# EAGLE board Status Board 0.3 (EAGLE 8.5.2)
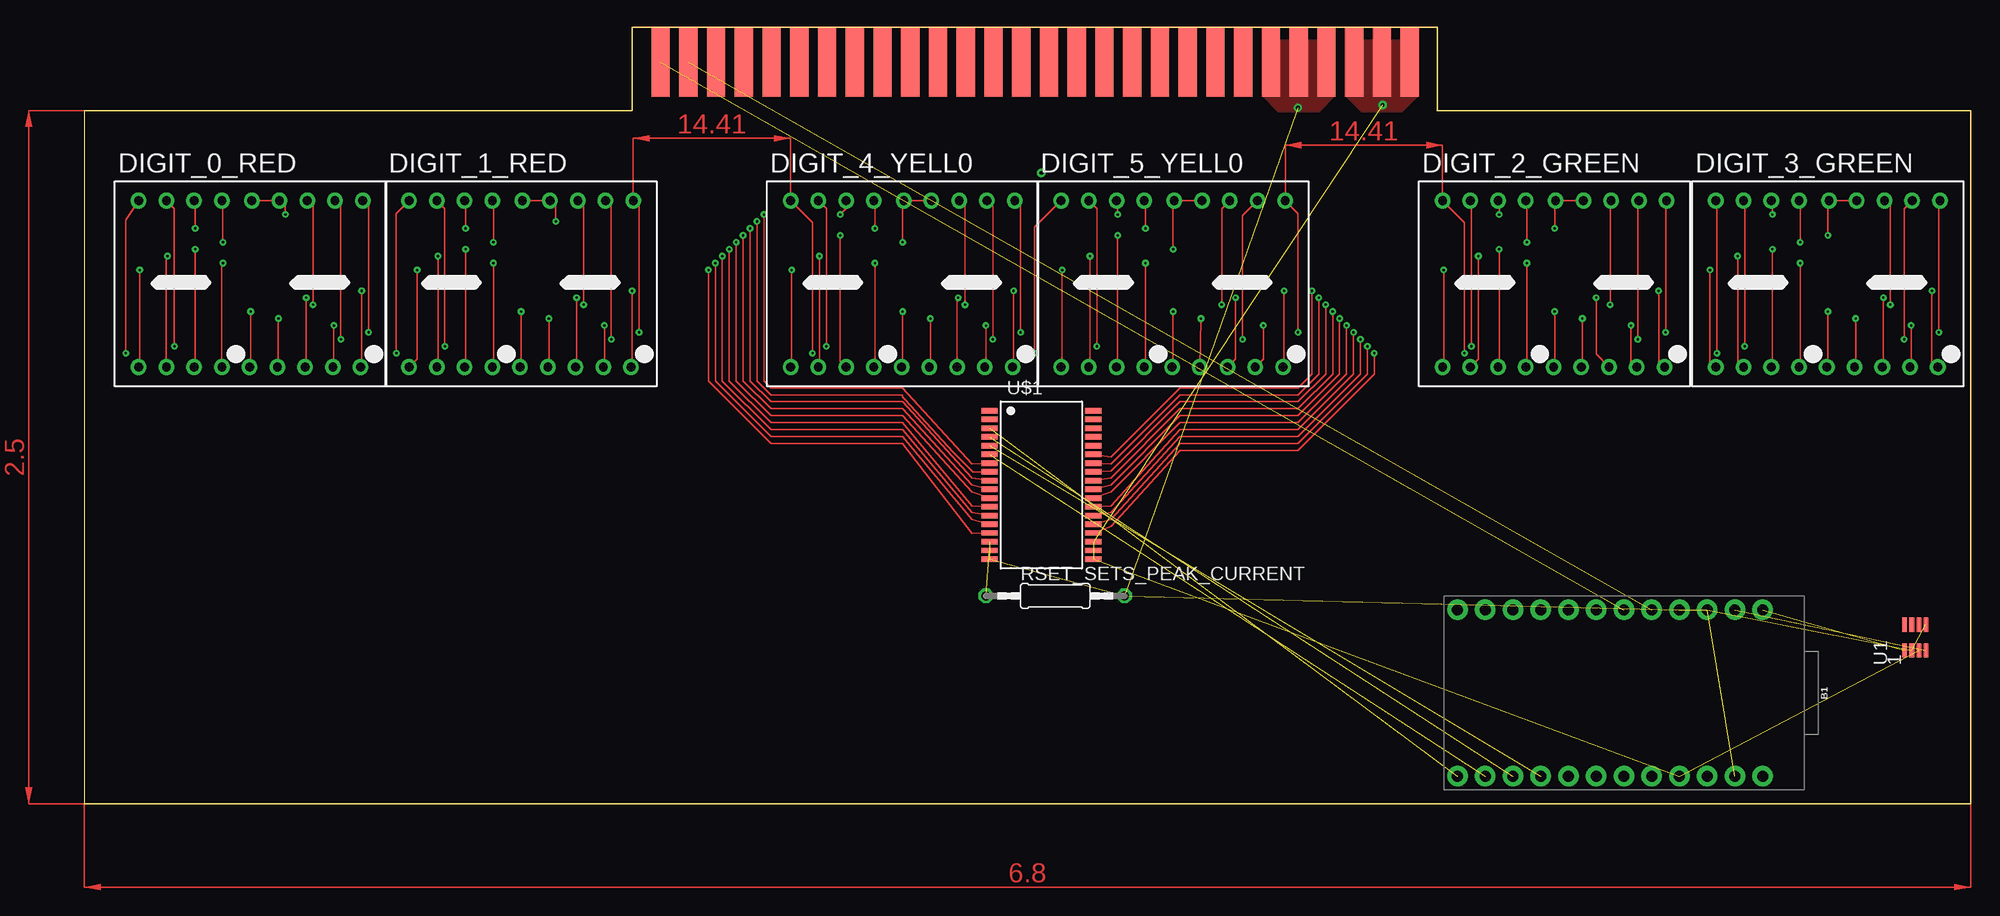
[diagram p0: board, top side]
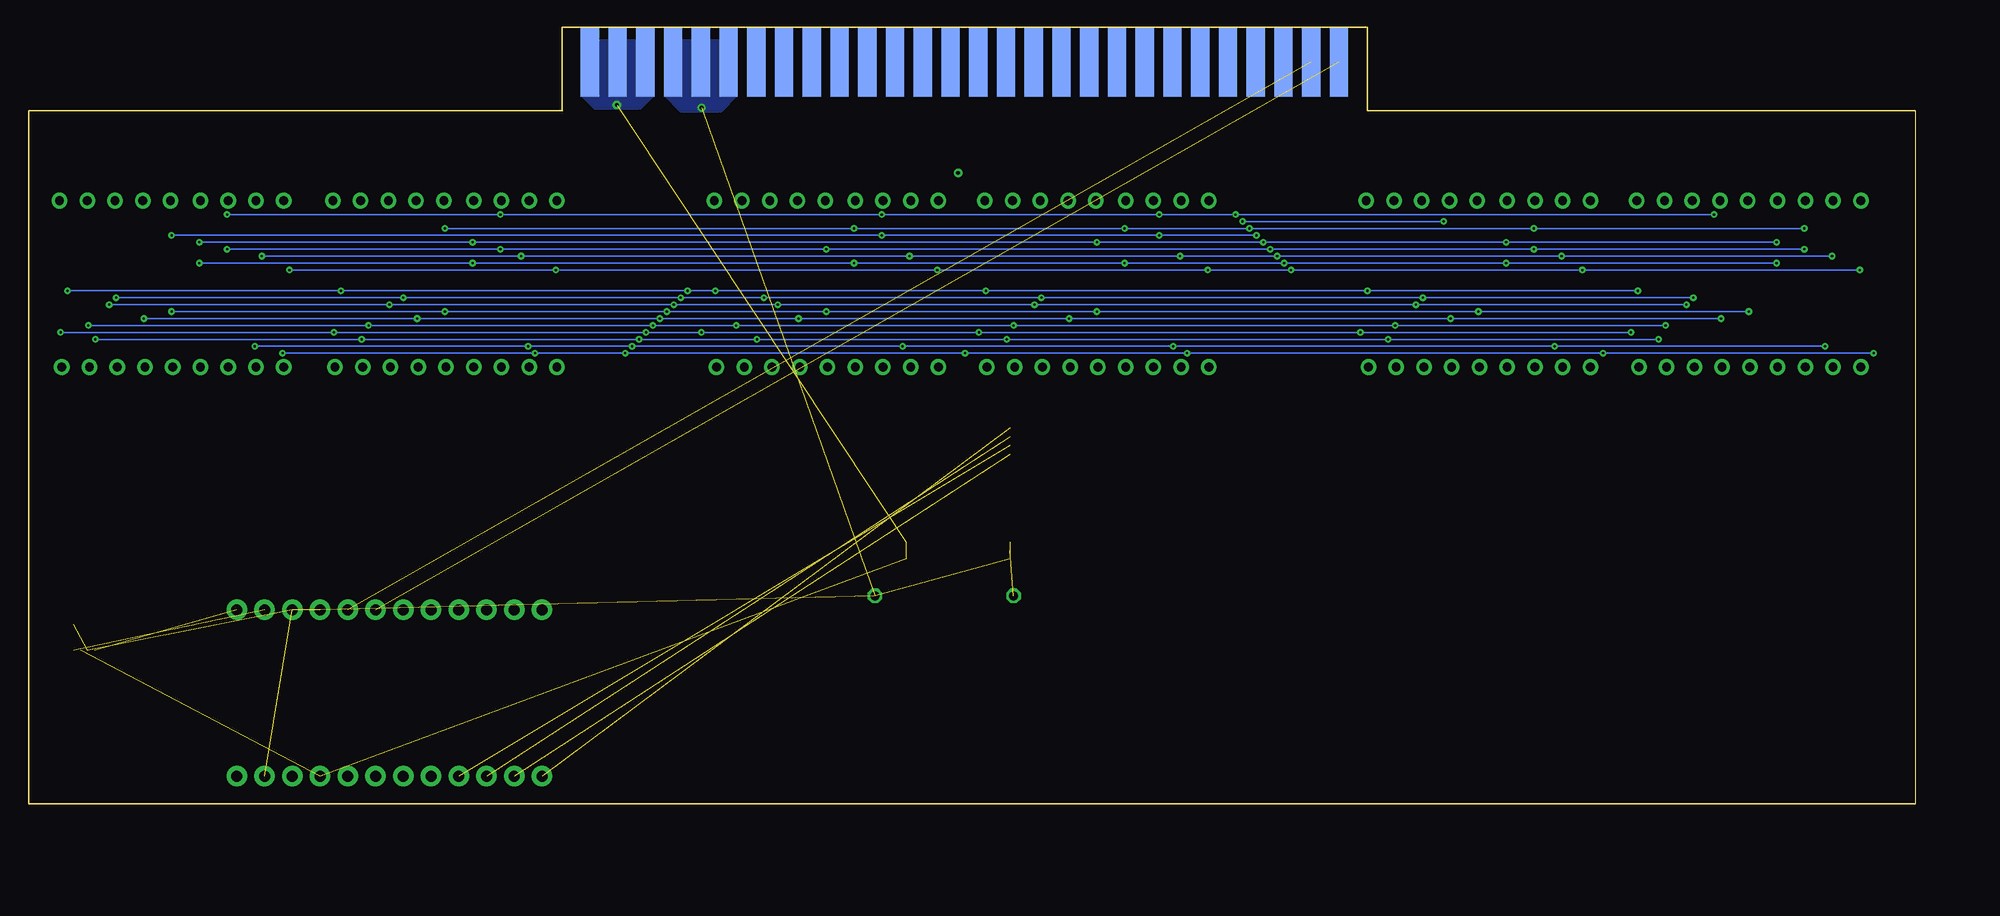
[diagram p1: board, bottom side, seen from below]

Size 172.72 x 71.12 mm. Coordinates in mm from the lower left corner, seen from the top.
Outline: 50.16,63.5 0,63.5 0,0 172.72,0 172.72,63.5 123.83,63.5
Copper layers (1*16): Top 0.035mm / dielectric 1.5mm / Bottom 0.035mm
Design rules "default": minimum track width 6mil, minimum drill 0.35mm, track to track 6mil, track to pad 6mil, pad to pad 6mil, via to via 6mil, smd to smd 6mil, copper to edge 40mil, drill to drill 6mil, minimum pad ring 10mil, minimum via ring 8mil, stop-mask expansion 4mil, vias tented up to drill 0mil, thermal gap 10mil

## Footprints (pad centres in the part's own frame; a part is rotated, then mirrored left to right if it is on the bottom)
SPARKFUN_PRO_MICRO = drill 1.016 pad 1.88: 1 -7.62,12.7; 2 -7.62,10.16; 3 -7.62,7.62; 4 -7.62,5.08; 5 -7.62,2.54; 6 -7.62,0; 7 -7.62,-2.54; 8 -7.62,-5.08; 9 -7.62,-7.62; 10 -7.62,-10.16; 11 -7.62,-12.7; 12 -7.62,-15.24; 13 7.62,-15.24; 14 7.62,-12.7; 15 7.62,-10.16; 16 7.62,-7.62; 17 7.62,-5.08; 18 7.62,-2.54; 19 7.62,0; 20 7.62,2.54; 21 7.62,5.08; 22 7.62,7.62; 23 7.62,10.16; 24 7.62,12.7
DA56 = drill 0.8 pad 1.422: 1 -10.26,-7.62; 2 -7.72,-7.62; 3 -5.18,-7.62; 4 -2.64,-7.62; 5 -0.1,-7.62; 6 2.44,-7.62; 7 4.98,-7.62; 8 7.52,-7.62; 9 10.06,-7.62; 10 10.26,7.62; 11 7.72,7.62; 12 5.18,7.62; 13 2.64,7.62; 14 0.1,7.62; 15 -2.64,7.62; 16 -5.18,7.62; 17 -7.72,7.62; 18 -10.26,7.62
1X02 = drill 1.016 pad 1.88: 1 0,0; 2 2.54,0
LED3MM = drill 0.813 octagon: A -1.27,0; K 1.27,0
0207/12 = drill 0.813 octagon: 1 -6.35,0; 2 6.35,0
8-SOICN = smd 1.3 x 0.42: 1 -1.175,0.975; 2 -1.175,0.325; 3 -1.174,-0.325; 4 -1.175,-0.975; 5 1.175,0.975; 6 1.175,0.325; 7 1.174,-0.325; 8 1.175,-0.975
SSOP36 = smd 0.5 x 1.5: 1 -6.8,-4.75; 2 -6,-4.75; 3 -5.2,-4.75; 4 -4.4,-4.75; 5 -3.6,-4.75; 6 -2.8,-4.75; 7 -2,-4.75; 8 -1.2,-4.75; 9 -0.4,-4.75; 10 0.4,-4.75; 11 1.2,-4.75; 12 2,-4.75; 13 2.8,-4.75; 14 3.6,-4.75; 15 4.4,-4.75; 16 5.2,-4.75; 17 6,-4.75; 18 6.8,-4.75; 19 6.8,4.75; 20 6,4.75; 21 5.2,4.75; 22 4.4,4.75; 23 3.6,4.75; 24 2.8,4.75; 25 2,4.75; 26 1.2,4.75; 27 0.4,4.75; 28 -0.4,4.75; 29 -1.2,4.75; 30 -2,4.75; 31 -2.8,4.75; 32 -3.6,4.75; 33 -4.4,4.75; 34 -5.2,4.75; 35 -6,4.75; 36 -6.8,4.75
5530843-6-BOARDFINGERS = smd 1.651 x 6.35 bottom: 3.3V_4 0.826,3.175; 3.3V_5 3.365,3.175; 3.3V_6 5.905,3.175; EXTRA1 16.066,3.175; EXTRA2 18.605,3.175; EXTRA3 21.145,3.175; EXTRA4 23.686,3.175; EXTRA5 26.226,3.175; EXTRA6 28.765,3.175; EXTRA7 31.305,3.175; EXTRA8 33.846,3.175; EXTRA9 36.386,3.175; EXTRA10 38.925,3.175; EXTRA11 41.465,3.175; EXTRA12 44.005,3.175; EXTRA13 46.545,3.175; EXTRA14 49.086,3.175; EXTRA15 51.626,3.175; EXTRA16 54.166,3.175; EXTRA17 56.706,3.175; EXTRA18 59.245,3.175; EXTRA19 61.785,3.175; EXTRA20 64.326,3.175; EXTRA21 66.865,3.175; EXTRA22 69.406,3.175; GND_4 8.445,3.175; GND_5 10.986,3.175; GND_6 13.525,3.175 | smd 1.651 x 6.35: 3.3VP1 0.826,3.175; 3.3VP2 3.365,3.175; 3.3VP3 5.905,3.175; CAN_H 51.626,3.175; CAN_L 54.166,3.175; EXTRA23 16.066,3.175; EXTRA24 18.605,3.175; EXTRA25 21.145,3.175; EXTRA26 23.686,3.175; EXTRA27 26.226,3.175; EXTRA28 28.765,3.175; EXTRA29 31.305,3.175; EXTRA30 33.846,3.175; EXTRA31 36.386,3.175; EXTRA32 38.925,3.175; EXTRA33 41.465,3.175; EXTRA34 44.005,3.175; EXTRA35 46.545,3.175; GND1 8.445,3.175; GND2 10.986,3.175; GND3 13.525,3.175; KILL_SWITCH 49.086,3.175; SCL_DEPTH 59.245,3.175; SCL_ESC 69.406,3.175; SCL_SENSOR 64.326,3.175; SDA_DEPTH 56.706,3.175; SDA_ESC 66.865,3.175; SDA_SENSOR 61.785,3.175

## Placement (x,y rotation side)
B1  SPARKFUN_PRO_MICRO  [SPARKFUN_PRO_MICRO]  140.97,10.16 270 top
DIGIT_0_RED  DC56-11SRWA  [DA56]  15.24,47.62 0 top
DIGIT_1_RED  DC56-11SRWA  [DA56]  40.01,47.62 0 top
DIGIT_2_GREEN  DC56-11GWA  [DA56]  134.62,47.62 0 top
DIGIT_3_GREEN  DC56-11GWA  [DA56]  159.64,47.62 0 top
DIGIT_4_YELL0  DC56-11YWA  [DA56]  74.93,47.62 0 top
DIGIT_5_YELL0  DC56-11YWA  [DA56]  99.69,47.62 0 top
J1  [1X02]  -53.34,114.3 0 top  (outside the outline)
LED7  [LED3MM]  -29.21,115.57 0 top  (outside the outline)
LED8  [LED3MM]  -38.1,115.57 0 top  (outside the outline)
LED9  [LED3MM]  -46.99,115.57 0 top  (outside the outline)
LED10  [LED3MM]  -81.28,110.49 0 top  (outside the outline)
LED11  [LED3MM]  -91.44,110.49 0 top  (outside the outline)
LED12  [LED3MM]  -20.32,115.57 0 top  (outside the outline)
RSET_SETS_PEAK_CURRENT  [0207/12]  88.9,19.05 0 top
U1  MAX3051ESA  [8-SOICN]  167.64,15.24 90 top
U$1  MAX6954  [SSOP36]  87.63,29.21 270 top
U$2  5530843  [5530843-6-BOARDFINGERS]  122.17,71.12 180 top

## Library data of the parts
B1 = SparkFun-Boards
DIGIT_0_RED DIGIT_1_RED DIGIT_2_GREEN DIGIT_3_GREEN DIGIT_4_YELL0 DIGIT_5_YELL0 = display-kingbright; OC_FARNELL: unknown; OC_NEWARK: unknown
J1 = SparkFun-Connectors
LED7-LED12 = led
RSET_SETS_PEAK_CURRENT = resistor
U1 = MAX3051ESA; AVAILABILITY: Good; DESCRIPTION: IC TXRX CAN 1MBPS 8-SOIC; MF: Maxim Integrated; MP: MAX3051ESA+; PACKAGE: SOIC-8 Maxim Integrated; PRICE: 2.21 USD
U$1 = MAX6954
U$2 = 5530843-6

## Nets
GND: B1.3 B1.4 B1.23 RSET_SETS_PEAK_CURRENT.2 U1.2 U1.8 U$1.16 U$1.18 U$2.GND1 U$2.GND2 U$2.GND3 U$2.GND_4 U$2.GND_5 U$2.GND_6
N$20: DIGIT_0_RED.13 DIGIT_0_RED.14 DIGIT_2_GREEN.16 DIGIT_3_GREEN.16 DIGIT_4_YELL0.16 DIGIT_5_YELL0.16 U$1.7
N$21: DIGIT_1_RED.13 DIGIT_1_RED.14 U$1.8
N$22: DIGIT_0_RED.16 DIGIT_1_RED.16 DIGIT_2_GREEN.13 DIGIT_2_GREEN.14 DIGIT_4_YELL0.15 DIGIT_5_YELL0.15 U$1.9
N$23: DIGIT_3_GREEN.13 DIGIT_3_GREEN.14 DIGIT_4_YELL0.3 DIGIT_5_YELL0.3 U$1.10
N$24: B1.14 U$1.6
N$25: B1.15 U$1.4
N$26: DIGIT_0_RED.15 DIGIT_1_RED.15 DIGIT_2_GREEN.15 DIGIT_3_GREEN.15 DIGIT_4_YELL0.13 DIGIT_4_YELL0.14 U$1.11
N$27: DIGIT_0_RED.3 DIGIT_1_RED.3 DIGIT_2_GREEN.3 DIGIT_3_GREEN.3 DIGIT_5_YELL0.13 DIGIT_5_YELL0.14 U$1.12
N$28: DIGIT_0_RED.1 DIGIT_1_RED.1 DIGIT_2_GREEN.1 DIGIT_3_GREEN.1 DIGIT_4_YELL0.1 DIGIT_5_YELL0.1 U$1.15
N$29: DIGIT_0_RED.18 DIGIT_1_RED.18 DIGIT_2_GREEN.18 DIGIT_3_GREEN.18 DIGIT_4_YELL0.18 DIGIT_5_YELL0.18 U$1.22
N$30: DIGIT_0_RED.17 DIGIT_1_RED.17 DIGIT_2_GREEN.17 DIGIT_3_GREEN.17 DIGIT_4_YELL0.17 DIGIT_5_YELL0.17 U$1.23
N$31: DIGIT_0_RED.11 DIGIT_1_RED.11 DIGIT_2_GREEN.11 DIGIT_3_GREEN.11 DIGIT_4_YELL0.11 DIGIT_5_YELL0.11 U$1.24
N$32: DIGIT_0_RED.10 DIGIT_1_RED.10 DIGIT_2_GREEN.10 DIGIT_3_GREEN.10 DIGIT_4_YELL0.10 DIGIT_5_YELL0.10 U$1.25
N$33: DIGIT_0_RED.2 DIGIT_1_RED.2 DIGIT_2_GREEN.2 DIGIT_3_GREEN.2 DIGIT_4_YELL0.2 DIGIT_5_YELL0.2 U$1.13
N$34: DIGIT_0_RED.6 DIGIT_1_RED.6 DIGIT_2_GREEN.6 DIGIT_3_GREEN.6 DIGIT_4_YELL0.6 DIGIT_5_YELL0.6 U$1.27
N$35: DIGIT_0_RED.5 DIGIT_1_RED.5 DIGIT_2_GREEN.5 DIGIT_3_GREEN.5 DIGIT_4_YELL0.5 DIGIT_5_YELL0.5 U$1.28
N$36: DIGIT_0_RED.12 DIGIT_1_RED.12 DIGIT_2_GREEN.12 DIGIT_3_GREEN.12 DIGIT_4_YELL0.12 DIGIT_5_YELL0.12 U$1.29
N$37: DIGIT_0_RED.7 DIGIT_1_RED.7 DIGIT_2_GREEN.7 DIGIT_3_GREEN.7 DIGIT_4_YELL0.7 DIGIT_5_YELL0.7 U$1.30
N$38: DIGIT_0_RED.9 DIGIT_1_RED.9 DIGIT_2_GREEN.9 DIGIT_3_GREEN.9 DIGIT_4_YELL0.9 DIGIT_5_YELL0.9 U$1.31
N$39: B1.16 U$1.5
N$40: DIGIT_0_RED.8 DIGIT_1_RED.8 DIGIT_2_GREEN.8 DIGIT_3_GREEN.8 DIGIT_4_YELL0.8 DIGIT_5_YELL0.8 U$1.26
N$41: B1.13 U$1.3
N$42: B1.6 U$2.SCL_ESC
N$43: B1.5 U$2.SDA_ESC
N$44: B1.1 U1.1
N$45: B1.2 U1.4
N$46: RSET_SETS_PEAK_CURRENT.1 U$1.17
N$56: DIGIT_0_RED.4 DIGIT_1_RED.4 DIGIT_2_GREEN.4 DIGIT_3_GREEN.4 DIGIT_4_YELL0.4 DIGIT_5_YELL0.4 U$1.14
RAW: B1.24
VCC: B1.21 U1.3 U$1.19 U$1.21 U$2.3.3V_4 U$2.3.3V_5 U$2.3.3V_6 U$2.3.3VP1 U$2.3.3VP2 U$2.3.3VP3

## Tracks (layer width: path | path; a pad name or v marks a point on that pad's centre or on a via)
GND  (via drill 0.35)  (8 unrouted)
  other vias: 111.12,63.75
  pour Bottom (no thermals): 114.43,70.23 107.95,70.23 107.95,64.9 109.35,63.5 113.03,63.5 114.43,64.9
  pour Top (no thermals): 107.95,64.9 109.35,63.5 113.03,63.5 114.43,64.9 114.43,69.85 107.95,69.85
N$1  (via drill 0.35)
  other vias: 87.63,57.78
N$20  (via drill 0.2)
  Top 0.152: U$1.7 81.28,31.11 74.93,38.1 62.87,38.1 62.23,38.73 v62.23,53.98 | DIGIT_0_RED.14 DIGIT_0_RED.13 18.41,54.71 v18.41,53.98 | v129.54,53.98 129.54,55.15 DIGIT_2_GREEN.16 | v154.56,53.98 154.56,55.15 DIGIT_3_GREEN.16 | v69.22,53.98 69.75,54.51 DIGIT_4_YELL0.16 | DIGIT_5_YELL0.16 94.61,55.15 v94.61,53.98
  Bottom 0.152: v18.41,53.98 v62.23,53.98 v69.22,53.98 v94.61,53.98 v129.54,53.98 v154.56,53.98
N$21  (via drill 0.2)
  Top 0.152: DIGIT_1_RED.14 DIGIT_1_RED.13 43.18,54.71 v43.18,53.34 | U$1.8 81.35,30.41 79.55,32.22 75.16,37.04 74.93,37.27 74.93,37.47 62.87,37.47 61.59,38.73 v61.59,53.34
  Bottom 0.152: v61.59,53.34 v43.18,53.34
N$22  (via drill 0.2)
  Top 0.152: U$1.9 81.28,29.84 74.93,36.83 62.87,36.83 60.96,38.73 v60.96,52.7 | v10.16,52.7 10.16,55.15 DIGIT_0_RED.16 | v34.92,52.7 34.92,55.15 DIGIT_1_RED.16 | v72.39,52.7 72.39,55.15 DIGIT_4_YELL0.15 | DIGIT_5_YELL0.15 97.16,55.15 v97.16,52.7 | v134.62,52.7 134.62,55.15 DIGIT_2_GREEN.14 DIGIT_2_GREEN.13
  Bottom 0.152: v10.16,52.7 v34.92,52.7 v60.96,52.7 v72.39,52.7 v97.16,52.7 v134.62,52.7
N$23  (via drill 0.2)
  Top 0.152: U$1.10 81.28,29.21 74.93,36.2 62.87,36.2 60.33,38.73 v60.33,52.07 | DIGIT_3_GREEN.13 DIGIT_3_GREEN.14 159.64,55.15 v159.64,52.07 | v69.22,52.07 69.22,40.54 DIGIT_4_YELL0.3 | v94.61,52.07 94.61,40.1 DIGIT_5_YELL0.3
  Bottom 0.152: v60.33,52.07 v69.22,52.07 v94.61,52.07 v159.64,52.07
N$24  (1 unrouted)
N$25  (1 unrouted)
N$26  (via drill 0.2)
  Top 0.152: U$1.11 81.28,28.57 74.93,35.56 62.87,35.56 59.69,38.73 v59.69,51.44 | DIGIT_4_YELL0.13 DIGIT_4_YELL0.14 74.93,55.15 v74.93,51.44 | v12.7,51.44 12.7,55.15 DIGIT_0_RED.15 | v37.47,51.44 37.47,55.15 DIGIT_1_RED.15 | v132.08,51.44 132.08,55.15 DIGIT_2_GREEN.15 | v157.1,51.44 157.1,55.15 DIGIT_3_GREEN.15
  Bottom 0.152: v12.7,51.44 v37.47,51.44 v59.69,51.44 v74.93,51.44 v132.08,51.44 v157.1,51.44
N$27  (via drill 0.2)
  Top 0.152: U$1.12 81.28,27.3 74.93,34.92 62.87,34.92 59.05,38.73 v59.05,50.8 | DIGIT_5_YELL0.13 DIGIT_5_YELL0.14 99.69,55.15 v99.69,50.8 | v10.16,50.8 10.16,40.1 DIGIT_0_RED.3 | v34.92,50.8 34.92,40.1 DIGIT_1_RED.3 | v129.54,50.8 129.54,40.1 DIGIT_2_GREEN.3 | v154.56,50.8 154.56,40.1 DIGIT_3_GREEN.3
  Bottom 0.152: v10.16,50.8 v34.92,50.8 v59.05,50.8 v99.69,50.8 v129.54,50.8 v154.56,50.8
N$28  (via drill 0.2)
  Top 0.152: U$1.15 81.28,24.77 74.93,33.02 62.87,33.02 57.15,38.73 v57.15,48.9 | v30.48,48.9 30.48,40.74 DIGIT_1_RED.1 | v5.08,48.9 5.08,40.1 DIGIT_0_RED.1 | v64.77,48.9 64.77,40.1 DIGIT_4_YELL0.1 | v89.53,48.9 89.53,40.1 DIGIT_5_YELL0.1 | v124.46,48.9 124.46,40.1 DIGIT_2_GREEN.1 | v148.84,48.9 148.84,40.54 DIGIT_3_GREEN.1
  Bottom 0.152: v5.08,48.9 v30.48,48.9 v57.15,48.9 v64.77,48.9 v89.53,48.9 v124.46,48.9 v148.84,48.9
N$29  (via drill 0.2)
  Top 0.152: U$1.22 93.98,25.4 100.33,32.38 111.12,32.38 118.11,39.37 v118.11,41.27 | v28.57,41.27 28.57,54.08 DIGIT_1_RED.18 | v3.81,41.27 3.81,53.44 DIGIT_0_RED.18 | v66.67,41.27 66.67,53.24 DIGIT_4_YELL0.18 | v87,41.27 87,52.8 DIGIT_5_YELL0.18 | v126.36,41.27 126.36,53.24 DIGIT_2_GREEN.18 | v149.48,41.27 149.48,55.15 DIGIT_3_GREEN.18
  Bottom 0.152: v3.81,41.27 v28.57,41.27 v66.67,41.27 v87,41.27 v118.11,41.27 v126.36,41.27 v149.48,41.27
N$30  (via drill 0.2)
  Top 0.152: U$1.23 93.98,26.04 100.33,33.02 111.12,33.02 117.47,39.37 v117.47,41.91 | v127,41.91 127,55.15 DIGIT_2_GREEN.17 | DIGIT_5_YELL0.17 92.71,54.51 v92.71,41.91 | v67.94,41.91 67.94,54.51 DIGIT_4_YELL0.17 | DIGIT_1_RED.17 33.02,54.51 v33.02,41.91 | v8.26,41.91 8.26,54.51 DIGIT_0_RED.17 | DIGIT_3_GREEN.17 152.02,55.15 v152.02,41.91
  Bottom 0.152: v8.26,41.91 v33.02,41.91 v67.94,41.91 v92.71,41.91 v117.47,41.91 v127,41.91 v152.02,41.91
N$31  (via drill 0.2)
  Top 0.152: U$1.24 93.98,26.67 100.33,33.66 111.12,33.66 116.84,39.37 v116.84,42.55 | v106.05,42.55 106.05,53.88 DIGIT_5_YELL0.11 | DIGIT_2_GREEN.11 142.24,55.15 v142.24,42.55 | DIGIT_3_GREEN.11 166.62,54.51 v166.62,42.55 | DIGIT_4_YELL0.11 83.19,54.71 v83.19,42.55 | DIGIT_1_RED.11 48.26,54.71 v48.26,42.55 | DIGIT_0_RED.11 23.5,54.71 v23.5,42.55
  Bottom 0.152: v166.62,42.55 v142.24,42.55 v116.84,42.55 v106.05,42.55 v83.19,42.55 v48.26,42.55 v23.5,42.55
N$32  (via drill 0.2)
  Top 0.152: U$1.25 93.98,27.3 100.33,34.29 111.12,34.29 116.2,39.37 v116.2,43.18 | v111.12,43.18 111.12,54.08 DIGIT_5_YELL0.10 | v144.78,43.18 144.78,55.15 DIGIT_2_GREEN.10 | DIGIT_3_GREEN.10 169.8,55.15 v169.8,43.18 | DIGIT_4_YELL0.10 85.72,54.71 v85.72,43.18 | DIGIT_1_RED.10 50.8,54.71 v50.8,43.18 | DIGIT_0_RED.10 26.04,54.71 v26.04,43.18
  Bottom 0.152: v169.8,43.18 v144.78,43.18 v116.2,43.18 v111.12,43.18 v85.72,43.18 v50.8,43.18 v26.04,43.18
N$33  (via drill 0.2)
  Top 0.152: U$1.13 81.28,26.67 74.93,34.29 62.87,34.29 58.42,38.73 v58.42,50.16 | DIGIT_0_RED.2 7.52,50.06 v7.62,50.16 | v32.38,50.16 32.38,40.1 DIGIT_1_RED.2 | v67.31,50.16 67.31,40.1 DIGIT_4_YELL0.2 | v92.08,50.16 92.08,40.1 DIGIT_5_YELL0.2 | DIGIT_2_GREEN.2 127.64,40.74 v127.64,50.16 | DIGIT_3_GREEN.2 151.38,40.54 v151.38,50.16
  Bottom 0.152: v7.62,50.16 v32.38,50.16 v58.42,50.16 v67.31,50.16 v92.08,50.16 v127.64,50.16 v151.38,50.16
N$34  (via drill 0.2)
  Top 0.152: U$1.27 93.98,29.21 100.33,35.56 111.12,35.56 114.94,39.37 v114.94,44.45 | v102.23,44.45 DIGIT_5_YELL0.6 | DIGIT_2_GREEN.6 137.16,40.1 v137.16,44.45 | DIGIT_3_GREEN.6 162.18,40.1 v162.18,44.45 | v77.47,44.45 77.47,40.1 DIGIT_4_YELL0.6 | DIGIT_1_RED.6 42.55,40.1 v42.55,44.45 | v17.78,44.45 17.78,40.1 DIGIT_0_RED.6
  Bottom 0.152: v162.18,44.45 v137.16,44.45 v114.94,44.45 v102.23,44.45 v77.47,44.45 v42.55,44.45 v17.78,44.45
N$35  (via drill 0.2)
  Top 0.152: U$1.28 93.98,29.84 100.33,36.2 111.12,36.2 114.3,39.37 v114.3,45.09 | v15.24,45.09 15.24,40.1 DIGIT_0_RED.5 | v40.01,45.09 40.01,40.1 DIGIT_1_RED.5 | v74.93,45.09 74.93,40.1 DIGIT_4_YELL0.5 | v99.69,45.09 99.69,40.1 DIGIT_5_YELL0.5 | v134.62,45.09 134.62,40.1 DIGIT_2_GREEN.5 | DIGIT_3_GREEN.5 159.64,40.1 v159.64,45.09
  Bottom 0.152: v15.24,45.09 v40.01,45.09 v74.93,45.09 v99.69,45.09 v114.3,45.09 v134.62,45.09 v159.64,45.09
N$36  (via drill 0.2)
  Top 0.152: U$1.29 93.98,30.48 100.33,36.83 111.12,36.83 113.67,39.37 v113.67,45.72 | v104.14,45.72 104.14,54.51 DIGIT_5_YELL0.12 | v139.7,45.72 139.7,55.15 DIGIT_2_GREEN.12 | v165.35,45.72 165.35,54.71 DIGIT_3_GREEN.12 | DIGIT_4_YELL0.12 80.64,54.71 v80.64,45.72 | DIGIT_1_RED.12 45.72,54.71 v45.72,45.72 | DIGIT_0_RED.12 20.95,54.71 v20.95,45.72
  Bottom 0.152: v165.35,45.72 v139.7,45.72 v113.67,45.72 v104.14,45.72 v80.64,45.72 v45.72,45.72 v20.95,45.72
N$37  (via drill 0.2)
  Top 0.152: U$1.30 93.98,31.11 100.33,37.47 111.12,37.47 113.03,39.37 v113.03,46.35 | v80.01,46.35 79.91,46.26 DIGIT_4_YELL0.7 | v138.43,46.35 138.43,41.17 DIGIT_2_GREEN.7 | v45.09,46.35 45.09,40.1 DIGIT_1_RED.7 | v20.32,46.35 20.32,40.1 DIGIT_0_RED.7 | v105.41,46.35 105.41,40.74 DIGIT_5_YELL0.7 | DIGIT_3_GREEN.7 164.72,40.1 v164.72,46.35
  Bottom 0.152: v20.32,46.35 v45.09,46.35 v80.01,46.35 v105.41,46.35 v113.03,46.35 v138.43,46.35 v164.72,46.35
N$38  (via drill 0.2)
  Top 0.152: U$1.31 93.98,31.75 100.33,38.1 111.12,38.1 112.39,39.37 v112.39,46.99 | v109.86,46.99 109.86,40.1 DIGIT_5_YELL0.9 | DIGIT_4_YELL0.9 85.09,40.1 v85.09,46.99 | DIGIT_1_RED.9 50.16,40.1 v50.16,46.99 | DIGIT_0_RED.9 25.4,40.1 v25.4,46.99 | v144.15,46.99 144.15,40.54 DIGIT_2_GREEN.9 | v169.16,46.99 169.16,40.54 DIGIT_3_GREEN.9
  Bottom 0.152: v25.4,46.99 v50.16,46.99 v85.09,46.99 v109.86,46.99 v112.39,46.99 v144.15,46.99 v169.16,46.99
N$39  (1 unrouted)
N$40  (via drill 0.2)
  Top 0.152: U$1.26 93.98,28.57 100.33,34.92 111.12,34.92 115.57,39.37 v115.57,43.81 | v107.95,43.81 107.95,40.74 DIGIT_5_YELL0.8 | DIGIT_4_YELL0.8 82.55,40.1 v82.55,43.81 | DIGIT_1_RED.8 47.62,40.1 v47.62,43.81 | DIGIT_0_RED.8 22.86,40.1 v22.86,43.81 | DIGIT_2_GREEN.8 141.6,40.54 v141.6,43.81 | DIGIT_3_GREEN.8 167.26,40.1 v167.26,43.81
  Bottom 0.152: v22.86,43.81 v47.62,43.81 v82.55,43.81 v107.95,43.81 v115.57,43.81 v141.6,43.81 v167.26,43.81
N$41  (1 unrouted)
N$42  (1 unrouted)
N$43  (1 unrouted)
N$44  (1 unrouted)
N$45  (1 unrouted)
N$46  (1 unrouted)
N$56  (via drill 0.2)
  Top 0.152: U$1.14 81.28,26.04 74.93,33.66 62.87,33.66 57.78,38.73 v57.78,49.53 | DIGIT_0_RED.4 12.6,49.43 v12.7,49.53 | v37.47,49.53 37.47,40.1 DIGIT_1_RED.4 | v72.39,49.53 72.39,40.1 DIGIT_4_YELL0.4 | v97.16,49.53 97.16,40.1 DIGIT_5_YELL0.4 | v132.08,49.53 132.08,40.1 DIGIT_2_GREEN.4 | v157.1,49.53 157.1,40.1 DIGIT_3_GREEN.4
  Bottom 0.152: v157.1,49.53 v132.08,49.53 v97.16,49.53 v72.39,49.53 v57.78,49.53 v37.47,49.53 v12.7,49.53
VCC  (via drill 0.35)  (4 unrouted)
  other vias: 118.87,64.01
  pour Top (no thermals): 115.57,70.36 115.57,64.9 116.97,63.5 120.65,63.5 122.05,64.9 122.05,70.36
  pour Bottom (no thermals): 115.57,70.23 115.57,64.9 116.71,63.75 120.9,63.75 122.05,64.9 122.05,70.23
(copper drawn outside any net)
  shapes: Top area x4